# Altium PCB SCOPE_old.PcbDoc (part 3 of 4)
Units mil, origin at the board's own origin, x right, y up, seen from the top; angles counter-clockwise.
Board outline 7710 x 4000 mil, 2 copper layers (Top Layer, Bottom Layer); 218 components, 350 nets, 1635 pads, 357 vias.
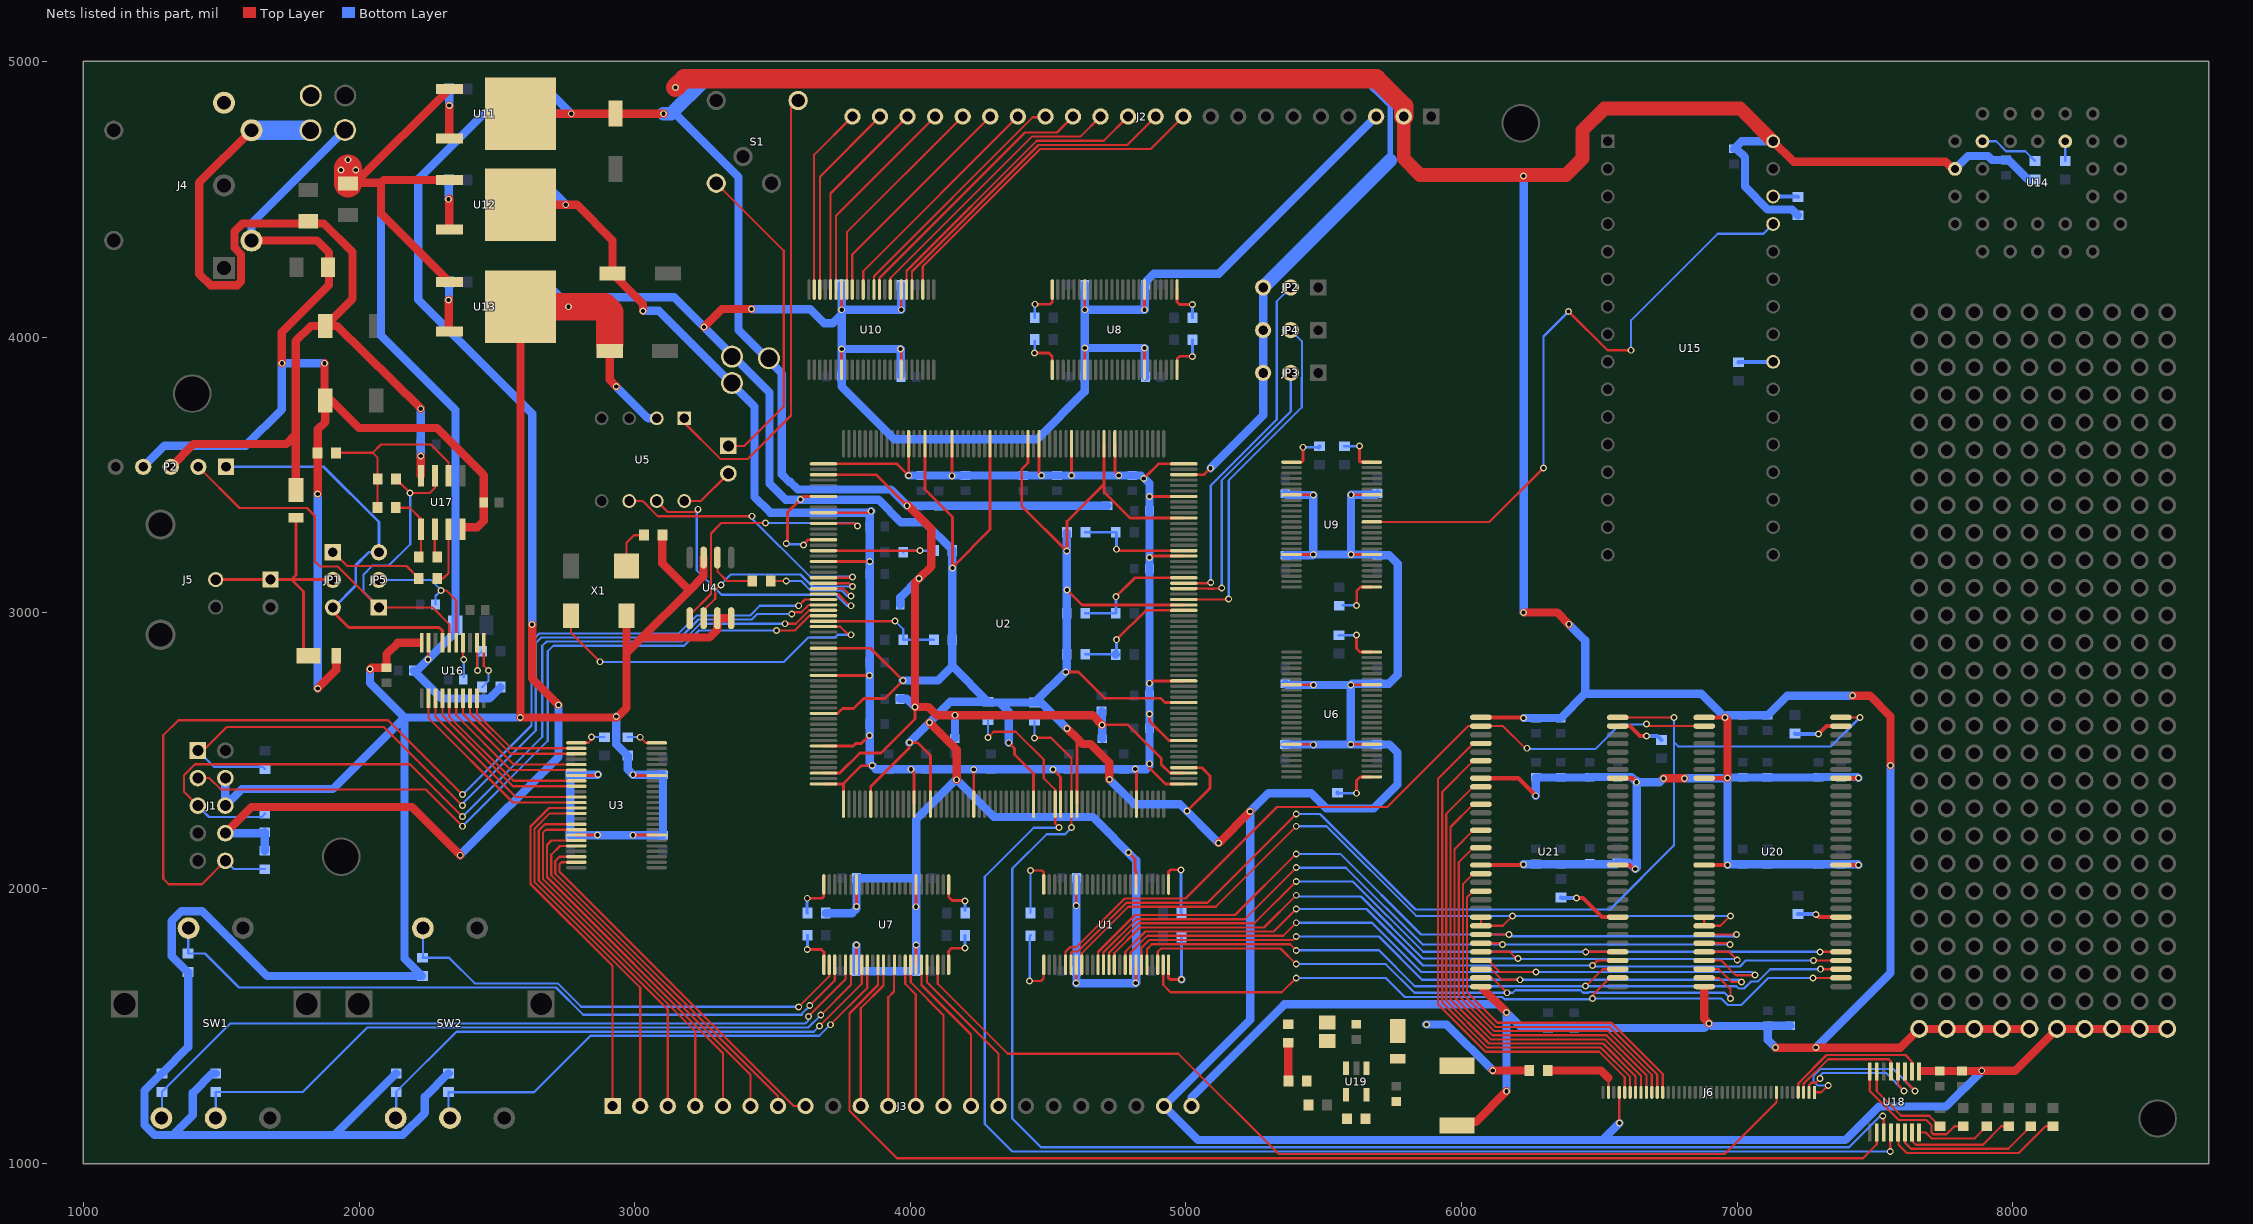
[diagram p3: the nets of this part, all layers, seen from the top]

## Via types
v1: diameter 25, hole 15, Top Layer to Bottom Layer, 357 vias

## Nets (pads, with @x,y where several pads share a name; then routed paths per layer and width w, separated by ;. In a path a pad name is that pad's centre, name@x,y a point inside that pad or via, vN(x,y) a via of type N, cw(c..) or ccw(c..) an arc to the next point about the centre after c; other vN are vias at no path point) (continued)
NetC60_1: C60.1 U16.14 | length 124
  Top Layer w8: U16.14@2377.5,2890.5 2377.5,2832.5 v1(2380,2830)
  Bottom Layer w8: C60.1@2380,2767.56 v1(2380,2830)
NetC61_1: C61.1 JP5.2 U16.15 | length 524.8
  Top Layer w8: v1(2298,3081) 2316,3081 2352.5,3044.5 U16.15@2352.5,2890.5
  Bottom Layer w8: JP5.2@2072,3119 2260,3119 v1(2298,3081) 2277.56,3060.56 C61.1@2277.56,3030
NetC69_1: C69.1 R59.1 R60.2 U19.3
NetC69_2: C69.2 C70.1 D3.K R35.2 R76.2 | length 442.7
  Top Layer w30: v1(6113,1339) R35.2@6245.54,1339
  Bottom Layer w30: v1(5872,1506) 5946,1506 v1(6113,1339)
NetD1_A: D1.A D2.K J5.1 JP1.2 P1.1 | length 952
  Top Layer w8: D2.K@1798.07,2862.73 D2.K@1816.8,2844
  Top Layer w10: J5.1@1480,3120 P1.1@1679,3120 1755,3120 ; D1.A@1771,3344.8 1771,3136 1755,3120 ; D2.K@1798.07,2862.73 1798.07,3076.93 1755,3120 ; JP1.2@1899,3120 1755,3120
NetD3_A: D3.A L1.2 U19.1
NetJ1_1: J1.1 R9.2 U2.27 | length 3186.5
  Top Layer w8: J1.1@1415,2500 1435,2500 1520,2585 2090,2585 v1(2375,2300) ; v1(3570,2995) 3576.5,3001.5 3604.73,3001.5 3631.42,3028.19 U2.27@3685,3028.19
  Bottom Layer w8: J1.1@1415,2500 1474,2441 1650.54,2441 R9.2@1659,2432.54 ; v1(2375,2300) 2375,2306.77 2641,2572.77 2641,2889.79 2661.21,2910 3166.21,2910 3231.21,2975 3425,2975 3445,2995 v1(3570,2995)
NetJ1_3: J1.3 U2.29 | length 2849.3
  Top Layer w8: J1.3@1415,2400 1457.02,2400 1498.02,2359 2241,2359 v1(2375,2225) ; v1(3515,2935) 3580.66,2935 3634.48,2988.82 U2.29@3685,2988.82
  Bottom Layer w8: v1(2375,2225) 2685,2535 2685,2860 2705,2880 3178.64,2880 3233.64,2935 v1(3515,2935)
NetJ1_5: J1.5 R8.2 U2.28 | length 3331.7
  Top Layer w8: J1.5@1415,2300 1365,2350 1365,2410 1405,2450 2185,2450 v1(2375,2260) ; v1(3545,2960) 3584.45,2960 3632.95,3008.5 U2.28@3685,3008.5
  Bottom Layer w8: J1.5@1415,2300 1456,2259 1646.54,2259 R8.2@1658,2270.46 R8.2@1645.54,2258 ; v1(2375,2260) 2665,2550 2665,2880 2680,2895 3172.43,2895 3237.43,2960 v1(3545,2960)
NetJ1_10: J1.10 R7.2 U2.26 | length 3945.2
  Top Layer w8: J1.10@1515,2100 1430,2015 1310,2015 1290,2035 1290,2555 1345,2610 2105,2610 v1(2375,2340) ; v1(3595,3025) 3617.87,3047.87 U2.26@3685,3047.87
  Bottom Layer w8: J1.10@1515,2100 1544.46,2070.54 R7.2@1658,2070.54 ; v1(2375,2340) 2626,2591 2626,2896 2655,2925 3160,2925 3225,2990 3418.79,2990 3453.79,3025 v1(3595,3025)
NetJ6_2: J6.2 R35.1 | length 283.6
  Top Layer w8: J6.2@6532.67,1260 6532.67,1312.33
  Top Layer w30: R35.1@6312.46,1339 6506,1339 6532.67,1312.33
NetJP1_1: JP1.1 R42.2 | length 350.1
  Top Layer w8: JP1.1@1906.54,3220 1957.54,3169 2172.54,3169 R42.2@2217.04,3124.5
NetJP1_3: JP1.3 JP5.3 P2.1 U16.17 | length 1526.3
  Top Layer w8: JP1.3@1894.34,3014.34 JP1.3@1897.34,3011.34
  Top Layer w10: JP1.3@1897.34,3011.34 1962.67,2946 2291,2946 2302.5,2934.5 U16.17@2302.5,2890.5
  Bottom Layer w10: P2.1@1517,3529 1872,3529 2072,3329 JP5.3@2072,3219 2035,3219 1988,3172 1988,3098 JP1.3@1909,3019
  Bottom Layer w30: JP1.3@1905,3019 JP1.3@1909,3019
NetJP2_2: JP2.2 U2.158 | length 1289.3
  Top Layer w8: U2.158@4992.09,3106.93 5076.93,3106.93 5080,3110 v1(5090,3110)
  Bottom Layer w8: v1(5090,3110) 5090,3461.21 5329.39,3700.61 5329.39,4129.39 JP2.2@5380,4180
NetJP3_2: JP3.2 U2.157 | length 1023.2
  Top Layer w8: U2.157@4992.09,3087.24 5079.52,3087.24 5080.27,3086.5 5099.73,3086.5 5100.48,3087.24 5122.24,3087.24 5125,3090 v1(5130,3090)
  Bottom Layer w8: v1(5130,3090) 5130,3480 5380,3730 JP3.2@5380,3870
NetJP4_2: JP4.2 U2.155 | length 1265.6
  Top Layer w8: U2.155@4992.09,3047.87 5152.87,3047.87 v1(5155,3050)
  Bottom Layer w8: v1(5155,3050) 5155,3480 5420,3745 5420,3852.16 5420.53,3852.69 5420.53,3984.47 JP4.2@5380,4025
NetJP5_1: JP5.1 P2.2 R39.2 U16.16 U17.7 | length 2068.5
  Top Layer w8: P2.2@1417,3529 1566,3380 1811,3380 1840,3351 1840,3186 1859,3167 1924,3167 JP5.1@2072,3019 2267,3019 2327.5,2958.5 U16.16@2327.5,2890.5 ; R39.2@2134.46,3485 v1(2185.46,3434) 2257,3434 2275,3452 U17.7@2275,3497
  Bottom Layer w8: JP5.1@2072,3019 2016,3075 2016,3138 2048,3170 2107,3170 2185.46,3248.46 v1(2185.46,3434)
NetR3_1: R3.1 U1.1 | length 250.5
  Top Layer w10: U1.1@4937,2014 4937,2060 4944,2067 v1(4982,2067)
  Bottom Layer w10: v1(4982,2067) 4982,1912.46 R3.1@4983.46,1911
NetR4_1: R4.1 U1.48 | length 252
  Top Layer w10: U1.48@4937,1722.66 4937,1674 4942,1669 v1(4984,1669)
  Bottom Layer w10: v1@4983.46,1669.54 R4.1@4983.46,1823
  Bottom Layer w30: v1@4983.46,1669.54 v1(4984,1669)
NetR5_1: R5.1 U1.24 | length 249.8
  Top Layer w8: v1(4436,2065) 4478,2065 4484.24,2058.76 U1.24@4484.24,2014
  Bottom Layer w8: R5.1@4435.54,1911 4435.54,2064.54 v1(4436,2065)
NetR6_1: R6.1 U1.25 | length 271.4
  Top Layer w8: v1(4433,1664) 4474,1664 4483,1673 4483,1721.42 U1.25@4484.24,1722.66
  Bottom Layer w8: v1(4433,1664) 4433,1826.46 R6.1@4436.54,1830
NetR10_1: R10.1 U4.2 | length 191
  Top Layer w8: U4.2@3300,3200 3300,3150 3335,3115 R10.1@3426.54,3115
NetR10_2: R10.2 U2.24 | length 425.6
  Top Layer w8: R10.2@3493.46,3115 v1(3550,3115) ; U2.24@3685,3087.24 3757.76,3087.24 v1(3785,3060)
  Bottom Layer w8: v1(3550,3115) 3603.79,3115 3638.79,3080 3751.77,3080 3770.27,3061.5 3783.5,3061.5 v1(3785,3060)
NetR11_1: R11.1 U3.24 | length 113.6
  Top Layer w8: v1(3020,2548) 3040.24,2527.76 U3.24@3080,2527.76
  Bottom Layer w8: R11.1@2975,2548.46 3019.54,2548.46 v1(3020,2548)
NetR12_1: R12.1 U3.25 | length 117.8
  Top Layer w8: U3.25@2788.66,2527.76 2831.76,2527.76 2844,2540 v1(2844,2549)
  Bottom Layer w8: v1(2844,2549) 2844.54,2548.46 R12.1@2890,2548.46 R12.1@2888.46,2550
NetR13_2: R13.2 R63.2 U2.159 | length 445.8
  Top Layer w10: v1(4746,3058) 4814.61,3126.61 U2.159@4992.09,3126.61
  Bottom Layer w10: R13.2@4634.46,2998 R63.2@4745.54,2998 4746,2998.46 v1(4746,3058)
NetR14_2: R14.2 R64.2 U2.153 | length 454.7
  Top Layer w10: v1(4748,2902) 4854.5,3008.5 U2.153@4992.09,3008.5
  Bottom Layer w10: R14.2@4634.46,2849 R64.2@4744.54,2849 ; R64.2@4745.54,2848 4748,2850.46 v1(4748,2902)
  Bottom Layer w30: R64.2@4744.54,2849 R64.2@4745.54,2848
NetR15_2: R15.2 R65.2 U2.17 | length 463.6
  Top Layer w8: U2.17@3685,3225.04 v1(4035.04,3225.04)
  Bottom Layer w8: R65.2@3974.46,3219 3980.5,3225.04 v1(4035.04,3225.04) R15.2@4085.54,3225 R15.2@4085.54,3225
NetR16_2: R16.2 U6.48 | length 172.9
  Top Layer w10: v1(5618.46,2918.46) 5618.46,2870.54 5632,2857 U6.48@5674.34,2857
  Bottom Layer w10: R16.2@5555,2918.46 v1(5618.46,2918.46)
NetR17_1: R17.1 X1.1 | length 156.9
  Top Layer w8: X1.1@2970,3170 2970,3253.46 2997.54,3281 R17.1@3032,3281
NetR18_2: R18.2 U6.25 | length 176.5
  Top Layer w10: v1(5619,2345) 5619,2391 5632.24,2404.24 U6.25@5674.34,2404.24
  Bottom Layer w10: R18.2@5551.54,2345 v1(5619,2345)
  Bottom Layer w15: R18.2@5550,2346.54 R18.2@5551.54,2345
NetR19_1: R19.1 U7.1 | length 130.4
  Top Layer w10: U7.1@4139,2014 4139,1969 4152,1956 4185,1956
  Bottom Layer w10: R19.1@4198.46,1920 v1(4198.46,1954)
NetR20_1: R20.1 U7.48 | length 159.9
  Top Layer w10: U7.48@4139,1722.66 4139,1770 4138,1771 4150,1783 v1(4198,1783)
  Bottom Layer w10: v1(4198,1783) 4198.46,1783.46 R20.1@4198.46,1829
NetR21_1: R21.1 U7.24 | length 160.6
  Top Layer w10: v1(3626,1964) 3679,1964 3686,1971 3686,2013.76 U7.24@3686.24,2014
  Bottom Layer w10: v1@3625,1964 3625,1911.54 R21.1@3626.54,1910
NetR22_1: R22.1 U7.25 | length 162.8
  Top Layer w10: v1(3626,1778) 3677,1778 3687,1768 3687,1723.42 U7.25@3686.24,1722.66
  Bottom Layer w10: v1@3626.54,1778 R22.1@3626.54,1830
NetR23_1: R23.1 U8.48 | length 161.7
  Top Layer w10: v1(4452,4119) 4507,4119 4515,4127 U8.48@4515,4172.34
  Bottom Layer w10: R23.1@4451.54,4070 v1@4451.54,4120
NetR24_1: R24.1 U8.24 | length 158.5
  Top Layer w10: U8.24@4968.48,3881 4968.48,3921.48 4977,3930 v1(5023,3930)
  Bottom Layer w10: v1@5023.46,3930 R24.1@5023.46,3990
NetR25_1: R25.1 U8.25 | length 152.2
  Top Layer w10: U8.25@4967.76,4172.34 4967.76,4127.24 4977,4118 v1(5023,4118)
  Bottom Layer w10: R25.1@5023.46,4070 v1@5023.46,4118
NetR26_1: R26.1 U8.1 | length 161
  Top Layer w10: v1(4451,3942) 4503,3942 4515,3930 U8.1@4515,3881
  Bottom Layer w10: v1@4451.54,3942 R26.1@4451.54,3985
NetR27_1: R27.1 U9.48 | length 157.2
  Top Layer w10: v1(5630,3605) 5630,3549 5632,3547 5673.34,3547 U9.48@5674.34,3546
  Bottom Layer w10: R27.1@5575,3603.46 v1@5628.46,3603.46
  Bottom Layer w15: v1@5628.46,3603.46 v1(5630,3605)
NetR29_1: R29.1 U9.1 | length 154.5
  Top Layer w10: U9.1@5383,3546 5420,3546 5425,3551 v1(5425,3600)
  Bottom Layer w10: v1(5425,3600) R29.1@5481.54,3600
  Bottom Layer w15: R29.1@5481.54,3600 R29.1@5485,3603.46
NetR30_1: R30.1 U9.25 | length 163.5
  Top Layer w10: v1@5620,3026 5620,3080 5633.24,3093.24 U9.25@5674.34,3093.24
  Bottom Layer w10: R30.1@5570,3026.54 5617.46,3026.54 v1@5619,3025
  other v1: 5619,3026
NetR31_2: R31.2 U11.3 | length 180.4
  Top Layer w30: U11.3@2327.5,4720 v1(2327.5,4840)
  Bottom Layer w30: R31.2@2326.54,4900 2327.5,4899.04 v1(2327.5,4840)
NetR32_2: R32.2 U14.31 | length 219.6
  Bottom Layer w8: U14.31@7890,4710 7939.09,4710 7975.09,4674 8044.46,4674 R32.2@8080,4638.46
NetR33_2: R33.2 U14.24 | length 71.5
  Bottom Layer w8: R33.2@8190,4638.46 U14.24@8190,4710
NetR34_2: R34.2 U15.24 | length 125.6
  Bottom Layer w15: R34.2@7005,3908.46 7006.54,3910 U15.24@7130,3910
NetR36_2: R36.2 U15.30 | length 90.6
  Bottom Layer w15: U15.30@7130,4510 7218.46,4510 R36.2@7220,4508.46
NetR37_2: R37.2 U16.12 | length 178.4
  Top Layer w8: U16.12@2427.5,2890.5 2427.5,2792.5 v1(2430,2790)
  Bottom Layer w8: v1(2430,2790) 2430,2843.46 R37.2@2446.54,2860
NetR38_2: R38.2 U16.11 | length 177.5
  Top Layer w8: U16.11@2452.5,2890.5 2452.5,2807.5 v1(2470,2790)
  Bottom Layer w8: R38.2@2446.54,2730 2470,2753.46 v1(2470,2790)
NetR39_1: R39.1 R40.1 R43.2 U17.6 | length 701.7
  Top Layer w8: R43.2@1916.46,3580 2050,3580 ; R40.1@2066.54,3381 2066.54,3563.46 2050,3580 ; U17.6@2325,3497 2325,3545 2260,3610 2080,3610 2050,3580
NetR40_2: R40.2 R41.1 U17.1 | length 249.5
  Top Layer w8: R40.2@2133.46,3381 2184,3381 2225,3340 U17.1@2225,3303 R41.1@2225,3199
NetR41_2: R41.2 U17.2 | length 104
  Top Layer w8: R41.2@2275,3199 U17.2@2275,3303
NetR42_1: R42.1 U17.3 | length 208.6
  Top Layer w8: R42.1@2283.46,3124 2304.68,3124 2325,3144.32 U17.3@2325,3303
NetR46_2: R46.2 U18.16 | length 272.3
  Top Layer w8: U18.16@7659.57,1114 7683.36,1114 7704.55,1092.82 7861.28,1092.82 R46.2@7905,1136.54
NetR47_2: R47.2 U18.15 | length 414.4
  Top Layer w8: U18.15@7633.98,1114 7633.98,1084.03 7648.01,1070 7891.42,1070 7957.96,1136.54 R47.2@7985,1136.54
NetR48_2: R48.2 U18.14 | length 536.7
  Top Layer w8: U18.14@7608.39,1114 7608.39,1076.61 7630,1055 7983.46,1055 R48.2@8065,1136.54
NetR49_2: R49.2 U18.13 | length 657.3
  Top Layer w8: U18.13@7582.8,1114 7585,1111.8 7585,1070 7615,1040 8021.42,1040 8117.96,1136.54 R49.2@8145,1136.54
NetR50_1: R50.1 U18.7 | length 353.8
  Top Layer w8: U18.7@7506.02,1336 7506.02,1263.98 7595,1175 7696.54,1175 R50.1@7735,1136.54
NetR51_1: R51.1 U18.8 | length 503.3
  Top Layer w8: U18.8@7480.43,1336 7480.43,1264.57 7585,1160 7685,1160 7704.31,1140.69 7704.31,1114.26 7710.76,1107.82 7759.24,1107.82 7787.96,1136.54 R51.1@7820,1136.54
NetR58_2: R58.2 U19.4
NetR59_2: R59.2 R76.1 | length 138.7
  Top Layer w30: R59.2@5370.54,1301 5371,1301.46 R76.1@5371,1439.54
NetR61_2: R61.2 R62.2 U2.30 | length 450.4
  Top Layer w8: U2.30@3685,2969.13 v1@3945,2969.13
  Bottom Layer w8: v1@3945,2969.13 3974.13,2940 3974.13,2902.33 R62.2@3974.46,2902 R61.2@4085.54,2902
  other v1: 3945,2970
NetR66_2: R66.2 R67.2 U2.164 | length 415.7
  Top Layer w10: v1(4748,3230) 4752.96,3225.04 U2.164@4992.09,3225.04
  Bottom Layer w10: R66.2@4635.46,3292 R67.2@4745.54,3292 ; v1(4748,3230) R67.2@4748,3289.54
NetR68_2: R68.2 U20.63 | length 178.5
  Top Layer w15: v1(7295,2560) 7323.5,2588.5 U20.63@7376.06,2588.5
  Bottom Layer w15: R68.2@7210,2561.54 7211.54,2560 v1(7295,2560)
NetR69_2: R69.2 U21.63 | length 179.7
  Top Layer w15: U21.63@6566.06,2588.5 6611.5,2588.5 6647,2553 v1(6671,2553)
  Bottom Layer w15: v1(6671,2553) 6710.46,2553 R69.2@6725,2538.46
NetR70_1: R70.1 U20.41 | length 160.6
  Top Layer w15: v1(7285,1905) 7294.41,1895.59 U20.41@7376.06,1895.59
  Bottom Layer w15: R70.1@7220,1906.54 7283.46,1906.54 v1(7285,1905)
NetR71_1: R71.1 U21.41 | length 235.5
  Top Layer w15: v1(6417,1965) 6440,1965 6509.41,1895.59 U21.41@6566.06,1895.59
  Bottom Layer w15: R71.1@6360,1966.54 6361.54,1965 v1(6417,1965)
NetR73_2: R73.2 U12.3 | length 186.7
  Top Layer w30: v1(2325,4500) 2327.5,4502.5 U12.3@2327.5,4390
  Bottom Layer w30: v1(2325,4500) 2325,4568.46 R73.2@2326.54,4570
NetR75_2: R75.2 U13.3 | length 181.7
  Top Layer w30: v1(2325,4135) 2325,4022.5 U13.3@2327.5,4020
  Bottom Layer w30: v1(2325,4135) 2326.54,4136.54 R75.2@2326.54,4200
NetS1_1: S1.1 U5.1 | length 1672.2
  Top Layer w8: U5.1@3172,3697 3312,3557 3409,3557 3567,3715 3567,4832 S1.1@3593,4858
NetS1_4: S1.4 W1.1 | length 1171.7
  Top Layer w8: S1.4@3296,4558 3541,4313 3541,3748 3398,3605 W1.1@3340,3605
NetU2_12: U2.12 U4.5 | length 1017.4
  Top Layer w8: U4.5@3200,2980 3200,2990.53 3277,3067.53 3277,3287.53 3314.47,3325 v1(3475,3325) ; U2.12@3685,3323.46 3798.54,3323.46 v1(3808,3314)
  Bottom Layer w8: v1(3475,3325) 3797,3325 v1(3808,3314)
NetU2_23: U2.23 U4.6 | length 771.3
  Top Layer w8: U4.6@3250,2980 3250,3008.79 3292,3050.79 3292,3082 3310,3100 v1(3312.5,3100) ; U2.23@3685,3106.93 3777.48,3106.93 3789.41,3095 v1(3790,3095)
  Bottom Layer w8: v1@3310,3100 3348.5,3138.5 3601.5,3138.5 3645,3095 v1(3790,3095)
NetU2_25: U2.25 U5.7 | length 1124.7
  Top Layer w8: U5.7@3080,3405 3120,3365 3220,3365 v1(3230,3375) ; U2.25@3685,3067.56 3737.44,3067.56 3780,3025 v1(3785,3025)
  Bottom Layer w8: v1(3230,3375) 3225,3370 3225,3154.27 3302.77,3076.5 3303.5,3076.5 3315,3065 3730,3065 3770,3025 v1(3785,3025)
NetU2_31: U2.31 X1.3 | length 1274.5
  Top Layer w8: X1.3@2769.21,2988.9 2769.21,2926.79 v1(2874,2822) ; U2.31@3685,2949.45 3745.55,2949.45 3774.45,2920.55 3784.45,2920.55 v1(3785,2920)
  Bottom Layer w8: v1@2874,2821 3541,2821 3630,2910 3726.21,2910 3736.21,2920 v1(3785,2920)
NetU5_8: U5.8 W1.2 | length 201.4
  Top Layer w8: U5.8@3180,3405 3240,3405 W1.2@3340,3505
PENIRQ: U7.35 U18.10 | length 4434
  Top Layer w8: U7.35@3883.09,1722.66 3883.09,1649.31 3779.47,1545.69 3779.47,1193.21 3951.69,1021 7456,1021 7506.02,1071.02 U18.10@7506.02,1114
PIN9: J2.10 U10.27 | length 1253.6
  Top Layer w8: U10.27@4045.39,4172.34 4045.39,4255.96 4471.43,4682 4872,4682 J2.10@4990,4800
PIN10: J2.11 U10.29 | length 1182.3
  Top Layer w8: U10.29@4006.01,4172.34 4006.01,4237.8 4465.21,4697 4787,4697 J2.11@4890,4800
PIN11: J2.12 U10.30 | length 1102.9
  Top Layer w8: U10.30@3986.33,4172.34 3986.33,4239.33 4459,4712 4702,4712 J2.12@4790,4800
PIN12: J2.13 U10.33 | length 1046.7
  Top Layer w8: U10.33@3927.28,4172.34 3927.28,4213.27 4441,4727 4617,4727 J2.13@4690,4800
PIN13: J2.14 U10.35 | length 986.4
  Top Layer w8: U10.35@3887.91,4172.34 3887.91,4213.9 4416,4742 4532,4742 J2.14@4590,4800
PIN14: J2.15 U10.36 | length 902
  Top Layer w8: U10.36@3868.22,4172.34 3868.22,4220.91 4444.31,4797 J2.15@4483,4797
PIN15: J2.16 U10.38 | length 860.1
  Top Layer w8: U10.38@3828.85,4172.34 3828.85,4238.85 J2.16@4390,4800
PIN16: J2.17 U10.40 | length 835
  Top Layer w8: U10.40@3789.48,4172.34 3789.48,4299.48 J2.17@4290,4800
PIN17: J2.18 U10.41 | length 801.7
  Top Layer w8: U10.41@3769.8,4172.34 3769.8,4379.8 J2.18@4190,4800
PIN18: J2.19 U10.43 | length 776.6
  Top Layer w8: U10.43@3730.43,4172.34 3730.43,4440.43 J2.19@4090,4800
PIN19: J2.20 U10.44 | length 743.3
  Top Layer w8: U10.44@3710.74,4172.34 3710.74,4520.74 J2.20@3990,4800
PIN20: J2.21 U10.46 | length 718
  Top Layer w8: U10.46@3672,4172.34 3672,4582 J2.21@3890,4800
PIN21: J2.22 U10.47 | length 685.2
  Top Layer w8: U10.47@3651,4172.34 3651,4661 J2.22@3790,4800
PIN22: J3.1 U3.37 | length 1332.1
  Top Layer w8: U3.37@2788.66,2291.53 2689.53,2291.53 2622,2224 2622,2016 2920,1718 J3.1@2920,1210
PIN23: J3.2 U3.38 | length 1340
  Top Layer w8: U3.38@2788.66,2271.85 2691.85,2271.85 2637,2217 2637,2022.21 3020,1639.21 J3.2@3020,1210
PIN24: J3.3 U3.40 | length 1339.8
  Top Layer w8: U3.40@2788.66,2232.48 2674.48,2232.48 2652,2210 2652,2028.43 3120,1560.43 J3.3@3120,1210
PIN25: J3.4 U3.41 | length 1347.2
  Top Layer w8: U3.41@2788.66,2212.8 2677.8,2212.8 2667,2202 2667,2034.64 3220,1481.64 J3.4@3220,1210
PIN26: J3.5 U3.43 | length 1324.7
  Top Layer w8: U3.43@2788.66,2173.43 2698.43,2173.43 2682,2157 2682,2040.85 3320,1402.85 J3.5@3320,1210
PIN27: J3.6 U3.44 | length 1316.3
  Top Layer w8: U3.44@2788.66,2153.74 2728.74,2153.74 2697,2122 2697,2047.07 3420,1324.07 J3.6@3420,1210
PIN28: J3.7 U3.46 | length 1306.7
  Top Layer w8: U3.46@2788.66,2114.37 2727.37,2114.37 2712,2099 2712,2053.28 3520,1245.28 J3.7@3520,1210
PIN29: J3.8 U3.47 | length 1336.7
  Top Layer w8: U3.47@2788.66,2094.68 2734.68,2094.68 2727,2087 2727,2060.31 3577.31,1210 J3.8@3620,1210
PIN31: J3.10 U7.36 | length 547
  Top Layer w8: J3.10@3820,1210 3820,1565 3902.78,1647.78 U7.36@3902.78,1722.66
PIN32: J3.11 U7.38 | length 521.4
  Top Layer w8: J3.11@3920,1210 3920,1605 3941,1626 U7.38@3941,1722.66
PIN33: J3.12 U7.40 | length 528.6
  Top Layer w8: U7.40@3981.52,1722.66 3981.52,1653.48 4020,1615 J3.12@4020,1210
PIN34: J3.13 U7.41 | length 561.9
  Top Layer w8: U7.41@4001.2,1722.66 4001.2,1658.8 4120,1540 J3.13@4120,1210
PIN35: J3.14 U7.43 | length 587
  Top Layer w8: U7.43@4040.57,1722.66 4040.57,1649.42 4220,1470 J3.14@4220,1210
PIN36: J3.15 U7.44 | length 620.2
  Top Layer w8: U7.44@4060.26,1722.66 4060.26,1659.74 4320,1400 J3.15@4320,1210
R0: J6.5 U21.4 | length 1868.3
  Top Layer w8: U21.4@6070,2525.51 6042.49,2525.51 5914.63,2397.65 5914.63,1579.29 6086.92,1407 6499.79,1407 6591.73,1315.06 J6.5@6591.73,1260
R1: J6.6 U21.6 | length 1801
  Top Layer w8: U21.6@6070,2462.52 6042.49,2462.52 5929.63,2349.66 5929.63,1585.5 6093.13,1422 6506,1422 6611.41,1316.59 J6.6@6611.41,1260
R2: J6.7 U21.9 | length 1702.6
  Top Layer w8: U21.9@6070,2368.03 6042.49,2368.03 5944.63,2270.17 5944.63,1591.71 6099.34,1437 6512.79,1437 6631.1,1318.69 J6.7@6631.1,1260
R3: J6.8 U21.11 | length 1635.3
  Top Layer w8: U21.11@6070,2305.04 6042.49,2305.04 5959.63,2222.18 5959.63,1597.93 6105.56,1452 6519,1452 6650.78,1320.22 J6.8@6650.78,1260
R4: J6.9 U21.14 | length 1536.7
  Top Layer w8: U21.14@6070,2210.55 6042.49,2210.55 5974.63,2142.69 5974.63,1604.14 6111.77,1467 6525.36,1467 6670.47,1321.89 J6.9@6670.47,1260
R5: J6.10 U21.16 | length 1469.4
  Top Layer w8: U21.16@6070,2147.56 6042.49,2147.56 5989.63,2094.7 5989.63,1610.35 6117.98,1482 6531.57,1482 6690.15,1323.42 J6.10@6690.15,1260
R6: J6.11 U21.19 | length 1370.6
  Top Layer w8: U21.19@6070,2053.07 6042.49,2053.07 6004.63,2015.21 6004.63,1616.57 6124.2,1497 6537.79,1497 6709.84,1324.95 J6.11@6709.84,1260
R7: J6.12 U21.21 | length 1303.4
  Top Layer w8: U21.21@6070,1990.08 6042.49,1990.08 6019.63,1967.22 6019.63,1622.78 6130.41,1512 6544,1512 6729.52,1326.48 J6.12@6729.52,1260
RAS: U1.35 U20.26 U21.26 | length 2852.6
  Top Layer w8: U1.35@4681.1,1726.66 4681.1,1769.24 4814.85,1903 5178,1903 v1(5400,2125) ; U21.26@6070,1832.6 v1(6172.4,1832.6) ; U20.26@6880,1832.6 v1(6997.6,1832.6)
  Bottom Layer w8: v1(5400,2125) 5560,2125 5852.4,1832.6 v1(6172.4,1832.6) 6178.5,1826.5 6991.5,1826.5 v1(6997.6,1832.6)
ROT0A: R55.2 SW1.1 U7.29 | length 2806.3
  Top Layer w8: v1(3630,1535) 3764.99,1669.98 U7.29@3764.99,1722.66
  Bottom Layer w8: SW1.1@1283.15,1166.61 1285,1168.46 R55.2@1285,1261.54 1533.46,1510 3620,1510 3630,1520 v1(3630,1535)
ROT0B: R56.2 SW1.3 U7.30 | length 2633.4
  Top Layer w8: v1(3675,1540) 3784.67,1649.67 U7.30@3784.67,1722.66
  Bottom Layer w8: SW1.3@1480,1166.61 R56.2@1480,1261.54 1796.54,1261.54 2030,1495 3630,1495 v1(3675,1540)
ROT1A: R52.2 SW2.1 U7.32 | length 2015.9
  Top Layer w8: v1(3670,1500) 3824.04,1654.04 U7.32@3824.04,1722.66
  Bottom Layer w8: SW2.1@2133.15,1166.61 2135,1168.46 R52.2@2135,1261.54 2353.46,1480 3650,1480 v1(3670,1500)
ROT1B: R53.2 SW2.3 U7.33 | length 1857.2
  Top Layer w8: v1(3710,1505) 3843.72,1638.72 U7.33@3843.72,1722.66
  Bottom Layer w8: SW2.3@2330,1166.61 2325,1171.61 R53.2@2325,1261.54 2326.54,1260 2635,1260 2840,1465 3670,1465 v1(3710,1505)
SCL: R1.2 U2.100 U18.12 | length 5222.3
  Top Layer w8: v1(4282,2547) 4303,2568 4383,2568 4484,2467 4484,2399 4525.55,2357.45 U2.100@4525.55,2305.75 4525.55,2234.45 v1(4540,2220) ; v1(7555,1045) 7555,1111.8 U18.12@7557.2,1114
  Bottom Layer w8: v1(4282,2547) R1.2@4282,2609.54 ; v1(4540,2220) 4448,2220 4270,2042 4270,1145 4370,1045 v1(7555,1045)
SCLK: U1.30 U20.64 U21.64 | length 4226.6
  Top Layer w8: U1.30@4582.67,1726.66 4582.67,1765.67 4588.06,1771.06 4607.64,1771.06 4784.57,1948 5078,1948 v1(5400,2270) ; U21.64@6566.06,2620 v1(6770,2620) ; U20.64@7376.06,2620 v1(7445,2620)
  Bottom Layer w8: v1(5400,2270) 5486.21,2270 5832.71,1923.5 6538.5,1923.5 6770,2155 v1(6770,2620) 6770,2531 6786,2515 7340,2515 v1(7445,2620)
SDA: R2.2 U2.103 U18.11 | length 4979.2
  Top Layer w8: v1(4451,2546) 4510,2546 4584.61,2471.39 U2.103@4584.61,2305.75 4584.61,2220.39 v1(4585,2220) ; v1@7528,1182 v1(7528,1174) 7531.61,1170.39 U18.11@7531.61,1114 U18.11@7532,1113.61
  Bottom Layer w8: v1(4451,2546) R2.2@4451,2607.54 ; v1(4585,2220) 4561.5,2196.5 4494.5,2196.5 4370,2072 4370,1165 4474.39,1060.61 7405.61,1060.61 7519,1174 v1(7528,1174)
SIG0: U3.36 U16.2 | length 735
  Top Layer w8: U16.2@2252.5,2689.5 2252.5,2617.5 2558.78,2311.22 U3.36@2788.66,2311.22
SIG1: U3.35 U16.3 | length 698.9
  Top Layer w8: U16.3@2277.5,2689.5 2277.5,2622.5 2569.09,2330.91 U3.35@2788.66,2330.91
SIG2: U3.33 U16.4 | length 655.4
  Top Layer w8: U16.4@2302.5,2689.5 2302.5,2627.5 2312.5,2617.5 2312.5,2616.29 2558.51,2370.28 U3.33@2788.66,2370.28
SIG3: U3.32 U16.5 | length 624.5
  Top Layer w8: U16.5@2327.5,2689.5 2327.5,2622.5 2560.04,2389.96 U3.32@2788.66,2389.96
SIG4: U3.30 U16.6 | length 580.2
  Top Layer w8: U16.6@2352.5,2689.5 2352.5,2627.5 2550.67,2429.33 U3.30@2788.66,2429.33
SIG5: U3.29 U16.7 | length 544.2
  Top Layer w8: U16.7@2377.5,2689.5 2377.5,2632.5 2560.99,2449.01 U3.29@2788.66,2449.01
SIG6: U3.27 U16.8 | length 500.6
  Top Layer w8: U16.8@2402.5,2689.5 2402.5,2636.29 2550.4,2488.39 U3.27@2788.66,2488.39
SIG7: U3.26 U16.9 | length 469.7
  Top Layer w8: U16.9@2427.5,2689.5 2427.5,2632.5 2551.93,2508.07 U3.26@2788.66,2508.07
SW0: R57.2 SW1.4 U7.27 | length 2734.5
  Top Layer w8: v1(3635,1575) 3725.61,1665.62 U7.27@3725.61,1722.66
  Bottom Layer w8: v1(3635,1575) 3635,1573.23 3606.5,1544.73 3606.5,1541.5 2813.19,1541.5 2714.48,1640.21 2606.94,1640.21 1564.79,1640.21 1441.54,1763.46 R57.2@1380,1763.46 ; R57.2@1380,1763.46 1380,1854.02 SW1.4@1381.57,1855.59 1381.57,1765.04 R57.2@1380,1763.46
SW1: R54.2 SW2.4 U7.26 | length 1745.3
  Top Layer w8: v1(3595,1570) 3705.93,1680.93 U7.26@3705.93,1722.66
  Bottom Layer w8: SW2.4@2231.57,1855.59 2231.57,1750.04 R54.2@2230,1748.46 2326.54,1748.46 2419.79,1655.21 2720.69,1655.21 2805.9,1570 v1(3595,1570)
TRG: U1.29 U20.2 U21.2 | length 2786.4
  Top Layer w8: U1.29@4562.98,1726.66 4562.98,1769.98 4579.06,1786.06 4601.42,1786.06 4778.36,1963 4998,1963 5330,2295 5730,2295 6023.5,2588.5 U21.2@6070,2588.5 6150,2588.5 6230.5,2508 v1(6236.75,2508) ; v1(6671,2596) 6678.5,2588.5 U20.2@6880,2588.5
  Bottom Layer w8: v1(6236.75,2508) 6230.5,2508 6233.5,2505 6485,2505 6574,2594 v1@6671,2594
VA0: U1.37 U20.37 U21.37 | length 3023.8
  Top Layer w8: U1.37@4720.47,1726.66 4720.47,1766.19 4827.28,1873 5248,1873 v1(5400,2025) ; v1(6450.39,1769.61) U21.37@6566.06,1769.61 ; v1(7300.39,1769.61) U20.37@7376.06,1769.61
  Bottom Layer w8: v1(5400,2025) 5605,2025 5860.39,1769.61 v1(6450.39,1769.61) v1(7300.39,1769.61)
VA1: U1.40 U20.36 U21.36 | length 2897.7
  Top Layer w8: U1.40@4779.52,1726.66 4779.52,1769.52 4853,1843 5318,1843 v1(5400,1925) ; v1(6475,1720) 6493.11,1738.11 U21.36@6566.06,1738.11 ; v1(7276.89,1738.11) U20.36@7376.06,1738.11
  Bottom Layer w8: v1(5400,1925) 5655,1925 5860,1720 v1(6475,1720) 6478.5,1716.5 7009.73,1716.5 7031.34,1738.11 v1(7276.89,1738.11)
VA2: U1.44 U20.35 U21.35 | length 2814.9
  Top Layer w8: U1.44@4858.26,1726.66 4858.26,1779.26 4876,1797 5378,1797 v1(5400,1775) ; v1(6450,1645) 6511.61,1706.61 U21.35@6566.06,1706.61 ; v1(7301.61,1706.61) U20.35@7376.06,1706.61
  Bottom Layer w8: v1(5400,1775) 5700,1775 5830,1645 v1(6450,1645) 6996.77,1645 7005.27,1636.5 7024.73,1636.5 7049.73,1661.5 7074.73,1661.5 7119.85,1706.61 v1(7301.61,1706.61)
VA3: U1.47 U20.34 U21.34 | length 2781
  Top Layer w8: U1.47@4917.31,1726.66 4917.31,1649.68 4944,1623 5348,1623 v1(5400,1675) ; v1(6475,1600) 6475,1611.56 6538.56,1675.12 U21.34@6566.06,1675.12 ; v1(7275.12,1675.12) U20.34@7376.06,1675.12
  Bottom Layer w8: v1(5400,1675) 5725,1675 5794,1606 6146.77,1606 6155.27,1597.5 6472.5,1597.5 v1(6475,1600) 6941.77,1600 6965.27,1576.5 7014.92,1576.5 7113.54,1675.12 v1(7275.12,1675.12)
VA4: U1.46 U20.31 U21.31 | length 2473.9
  Top Layer w8: U1.46@4897.63,1726.66 4897.63,1769.63 4910,1782 5343,1782 v1(5400,1725) ; U21.31@6070,1675.12 6110.88,1675.12 v1(6165,1621) ; U20.31@6880,1675.12 6935,1675 6975,1635 v1(6975,1600)
  Bottom Layer w8: v1(5400,1725) 5725,1725 5829,1621 v1(6165,1621) 6186,1621 6195,1630 6431.77,1630 6440.27,1621.5 6459.73,1621.5 6461.73,1623.5 6484.73,1623.5 6486.73,1621.5 6953.5,1621.5 v1(6975,1600)
VA5: U1.43 U20.30 U21.30 | length 2631
  Top Layer w8: U1.43@4838.57,1726.66 4838.57,1784.58 4866,1812 5387,1812 v1(5400,1825) ; U21.30@6070,1706.61 6107.17,1706.61 6145.29,1668.5 v1(6211.5,1668.5) ; U20.30@6880,1706.61 6933.39,1706.61 6980,1660 v1(7015,1660)
  Bottom Layer w8: v1(5400,1825) 5700,1825 5856.5,1668.5 v1(6211.5,1668.5) 7006.5,1668.5 v1(7015,1660)
VA6: U1.41 U20.29 U21.29 | length 2854.3
  Top Layer w8: U1.41@4799.2,1726.66 4799.2,1767.2 4860,1828 5353,1828 v1(5400,1875) ; U21.29@6070,1738.11 6097.51,1738.11 6120.37,1715.25 6120.37,1714.63 6138.5,1696.5 v1(6270,1696.5) ; U20.29@6880,1738.11 6941.89,1738.11 6995,1685 v1(7065,1685)
  Bottom Layer w8: v1(5400,1875) 5675,1875 5853.5,1696.5 v1(6270,1696.5) 7053.5,1696.5 v1(7065,1685)
VA7: U1.38 U20.28 U21.28 | length 2765.6
  Top Layer w8: U1.38@4740.15,1726.66 4740.15,1764.66 4833.49,1858 5283,1858 v1(5400,1975) ; U21.28@6070,1769.61 6174.61,1769.61 6199.21,1745 v1(6205,1745) ; U20.28@6880,1769.61 6970.39,1769.61 v1(7000,1740)
  Bottom Layer w8: v1(5400,1975) 5405,1970 5635,1970 5860,1745 v1@6202.21,1745 ; v1(6205,1745) v1@6202.21,1745 ; v1(7000,1740) 6996.5,1743.5 6200.71,1743.5 v1@6202.21,1745
VA8: U1.36 U20.27 U21.27 | length 2735.5
  Top Layer w8: U1.36@4700.78,1726.66 4700.78,1767.71 4821.07,1888 5213,1888 v1(5400,2075) ; U21.27@6070,1801.1 6143.9,1801.1 v1(6148.9,1796.1) ; U20.27@6880,1801.1 6968.9,1801.1 v1(6973.9,1796.1)
  Bottom Layer w8: v1(5400,2075) 5580,2075 5860,1795 5860,1796.1 v1(6148.9,1796.1) v1(6973.9,1796.1)
VCC5: C1.1 C55.1 C56.1 C58.1 C68.1 C71.1 C72.1 C73.1 C74.1 C75.1 C76.1 C77.1 C78.1 C79.1 C80.1 C81.1 C82.1 C83.1 C84.1 C85.1 C86.1 C87.1 C88.1 C89.1 C90.1 C91.1 C92.1 C93.1 C94.1 C100.1 J2.2 J3.22 J4.5 L1.1 pad.0@7660,1490 pad.0@7760,1490 pad.0@7860,1490 pad.0@7960,1490 pad.0@8060,1490 pad.2@1825,4876 R32.1 R36.1 R38.1 R58.1 U11.1 U12.1 U13.1 U14.32 U15.32 U16.19 U19.5 U20.1 U20.8 U20.18 U20.32 U20.47 U20.57 U21.1 U21.8 U21.18 U21.32 U21.47 U21.57 | length 22806.4
  Top Layer w8: v1(2250,2830) 2252.5,2832.5 U16.19@2252.5,2890.5
  Top Layer w15: U21.18@6070,2084.57 v1@6224,2084.57 ; U21.8@6070,2399.53 6205.47,2399.53 v1(6269,2336) ; U21.1@6070,2620 v1@6225,2620 ; U21.47@6566.06,2084.57 6609.13,2084.57 6623.69,2070 v1(6630,2070) ; U21.57@6566.06,2399.53 6620.47,2399.53 v1(6635,2385) ; U20.18@6880,2085 v1(6965,2085) ; U20.8@6880,2399.53 v1@6964.53,2399.53 ; U20.1@6880,2620 v1(6955,2620) ; U20.47@7376.06,2084.57 v1(7439.57,2084.57) ; U20.57@7376.06,2399.53 v1@7439.53,2399.53
  Top Layer w30: C1.1@1960,4557.09 1984.59,4557.09 C1.1@1987.5,4560 ; U13.1@2327.5,4200 2080,4447.5 2080,4560 ; U12.1@2327.5,4570 2090,4570 2080,4560 ; U11.1@2327.5,4900 C1.1@1987.5,4560 ; 6049,1153 6052,1153 v1(6163,1264) ; U21.32@6076.31,1637.31 6163,1550.62 v1(6163,1550) ; v1(6225,3001) 6347,3001 v1(6390,2958) ; v1(6733,2399) v1(6808,2399) ; 6880,1632 6880,1527 v1(6897,1510) ; v1(6955,2620) 6965,2610 v1(6965,2400) v1@6964.53,2399.53 ; U15.32@7130,4710 7204,4636 7755.11,4636 7781.11,4610 U14.32@7790,4610 ; v1(7139,1422) v1(7285,1422) 7592,1422 pad.0@7660,1490 pad.0@7760,1490 pad.0@7860,1490 pad.0@7960,1490 pad.0@8060,1490 ; v1(7418,2699) 7481,2699 7556,2624 v1(7556,2446) ; C1.1@1987.5,4560 2080,4560
  Top Layer w50: J2.2@5790,4800 5790,4647 5849,4588 6379,4588 6439,4648 6439,4750 6518,4829 7011,4829 U15.32@7130,4710
  Top Layer w70: v1(3148,4905) 3180,4937 5690,4937 5790,4837 J2.2@5790,4800
  Top Layer w100: C1.1@1960,4557.09 1960,4612
  Bottom Layer w8: 8055.48,4571.54 R32.1@8080,4571.54
  Bottom Layer w30: 2080,4560 2080,4005 2350,3735 2350,2930 v1(2250,2830) C58.1@2210,2790 ; C58.1@2197.56,2790 2299.24,2688.31 2473.36,2688.31 2513.46,2728.41 R38.1@2513.46,2730 ; J3.22@5020,1210 5020,1242 5357,1579 6134,1579 v1(6163,1550) ; v1(6163,1264) v1(6163,1550) ; v1@6224,2087.44 C90.1@6360,2087.44 6560,2087.44 C85.1@6565,2092.44 6607.56,2092.44 v1(6630,2070) 6635,2075 v1(6635,2385) ; v1(6225,2617.56) C93.1@6270,2617.56 C94.1@6360,2617.56 6448.44,2706 ; v1(6225,3001) v1(6225,4584) ; v1(6269,2336) 6269,2401.44 C91.1@6270,2402.44 C92.1@6360,2402.44 C82.1@6465,2402.44 6466.02,2403.47 C81.1@6566.06,2403.47 6616.53,2403.47 v1(6635,2385) ; v1(6390,2958) 6448.44,2899.56 6448.44,2706 ; v1@6635,2391.54 v1(6635,2385) ; v1(6733,2399) 6719,2385 v1(6635,2385) ; v1(6808,2399) 6964,2399 v1(6965,2400) ; U15.32@7130,4710 7015.44,4710 C55.1@6988,4682.56 6997.46,4682.56 7027.72,4652.3 7027.72,4545.82 7110.53,4463 7198.54,4463 R36.1@7220,4441.54 ; v1(7139,1422) 7111,1450 C75.1@7111,1500.44 ; C76.1@7192,1501.44 7112,1501.44 C75.1@7111,1500.44 ; v1(7285,1422) 7556,1693 v1(7556,2446) ; v1(7418,2699) 7181.44,2699 C84.1@7110,2627.56 C83.1@7020,2627.56 6962.56,2627.56 v1(6955,2620) 6869,2706 6448.44,2706 ; v1(7439.57,2084.57) 7436.69,2087.44 C73.1@7375,2087.44 C74.1@7295,2087.44 C78.1@7110,2087.44 C77.1@7020,2087.44 6967.44,2087.44 v1(6965,2085) v1(6965,2400) ; v1(7440,2400) 7436.53,2403.47 C71.1@7376.06,2403.47 7296.02,2403.47 C72.1@7295,2402.44 C80.1@7110,2402.44 C79.1@7020,2402.44 6967.44,2402.44 v1(6965,2400) ; U14.32@7790,4610 7837,4657 7909.47,4657 7923.91,4642.56 C56.1@7975,4642.56 ; C56.1@7984.46,4642.56 8055.48,4571.54 ; v1(6163,1550) 6219.56,1493.44 C87.1@6313,1493.44 C88.1@6409,1493.44 6880.44,1493.44 v1(6897,1510) 6906.56,1500.44 C75.1@7111,1500.44
  other v1: 6224,2086 1934,4606 1988,4606 1960,4643
VCC25: C2.1 C3.1 C4.1 C5.1 C24.1 C95.1 C96.1 C97.1 J1.8 JP2.3 JP3.3 JP4.3 pad.3@3487,3923 R7.1 R8.1 R28.1 U2.3 U2.58 U2.123 U2.178 U11.2 | length 15595.9
  Top Layer w10: U2.58@3685,2417.95 3743.91,2417.95 3816.96,2491 3893,2491 4017,2615 v1(4017,2658) ; U2.3@3685,3500.63 3875.37,3500.63 v1(3988,3388) ; v1(4696,2593) 4790,2593 4910,2473 4910,2450 4942.05,2417.95 U2.123@4992.09,2417.95 ; U2.178@4992.09,3500.63 5065.63,3500.63 v1(5089,3524)
  Top Layer w30: J1.8@1515,2200 1610,2295 2192,2295 v1(2367,2120) ; U11.2@2586,4810 v1(2770,4810) 2929.61,4810 C24.1@2930,4810.39 3104.61,4810.39 v1(3105,4810) ; v1(2628,2957) 2628,2761 v1(2724,2665) ; v1@3990,3390 4076,3304 4076,3168 v1(4032,3124) 4017,3109 v1(4017,2658) 4065.33,2658 4095.33,2628 v1(4162,2628) 4661,2628 v1(4696,2593)
  Bottom Layer w10: 4038.44,3388 4039,3387.44
  Bottom Layer w20: 5693,4907 5694.56,4907 ; 5740.56,4640.56 5740.56,4861
  Bottom Layer w30: J1.8@1515,2200 1653.46,2200 R8.1@1653.46,2199 ; R7.1@1658,2136.46 R8.1@1658,2203.54 ; v1(2367,2120) 2724,2477 v1(2724,2665) ; R28.1@2603.46,4900 2680,4900 v1(2770,4810) 2451,4810 2215,4574 2215,4135 2628,3722 v1(2628,2957) ; v1(3105,4810) 3148,4810 3377,4581 3377,4025 3534,3868 3534,3501 3560,3475 3564,3475 3592,3447 3929,3447 v1(3988,3388) 4038.44,3388 ; C2.1@3961.56,2688 3987,2688 v1(4017,2658) ; C95.1@3963.56,3029 3963.56,3055.56 v1(4032,3124) ; 4040,3386.44 4039,3387.44 C5.1@4715,3387.44 ; C96.1@4161,2543.56 4162,2544.56 v1(4162,2628) ; C97.1@4694,2643.44 4694,2595 v1(4696,2593) C4.1@4696,2542.56 ; v1(5089,3524) 5280,3715 JP3.3@5280,3870 JP4.3@5280,4025 JP2.3@5280,4180
  Bottom Layer w50: v1(3105,4810) 3132,4810 3257,4935 5665,4935 5693,4907 ; JP2.3@5280,4180 5740.56,4640.56 ; 5694.56,4907 5740.56,4861
VCC33: C26.1 C27.1 C28.1 C29.1 C30.1 C31.1 C32.1 C33.1 C34.1 C35.1 C36.1 C37.1 C38.1 C39.1 C40.1 C41.1 C42.1 C43.1 C44.1 C45.1 C46.1 C47.1 C48.1 C49.1 C50.1 C51.1 C52.1 C53.1 C54.1 C57.1 C66.1 C67.1 J1.4 J1.6 J2.3 J3.21 J6.4 pad.0@8160,1490 pad.0@8260,1490 pad.0@8360,1490 pad.0@8460,1490 pad.0@8560,1490 pad.4@3353,3929 R1.1 R2.1 R11.2 R13.1 R14.1 R15.1 R17.2 R21.2 R52.1 R53.1 R54.1 R55.1 R56.1 R57.1 R61.1 R66.1 R74.1 U1.7 U1.18 U1.31 U1.42 U2.7 U2.15 U2.35 U2.47 U2.66 U2.77 U2.96 U2.104 U2.124 U2.136 U2.154 U2.170 U2.192 U2.206 U2.213 U2.225 U3.7 U3.18 U3.31 U3.42 U4.3 U4.7 U4.8 U5.2 U6.7 U6.18 U6.31 U6.42 U7.7 U7.18 U7.31 U7.42 U8.7 U8.18 U8.31 U8.42 U9.7 U9.18 U9.31 U9.42 U10.7 U10.18 U10.31 U10.42 U13.2 U16.20 U18.1 X1.4 | length 42048.3
  Top Layer w10: U3.42@2788.66,2193.11 v1@2865,2193.11 ; U3.31@2788.66,2409.64 v1@2863.64,2409.64 ; v1@2994,2409.64 U3.18@3080,2409.64 ; v1@2994.55,2193.11 U3.7@3080,2193.11 ; v1(3550,3251) 3554.5,3255.5 3554.5,3364.5 v1(3601,3411) 3611.89,3421.89 U2.7@3685,3421.89 ; v1(3612,3246) 3612,3247 3629.41,3264.41 U2.15@3685,3264.41 ; U2.47@3685,2634.49 3736.49,2634.49 3754,2652 3794,2652 3831,2689 3908,2689 v1(3973,2754) 3856.29,2870.71 U2.35@3685,2870.71 ; U10.7@3750.11,3881 v1@3750.11,3957 ; v1@3750.11,4099.89 U10.42@3750.11,4172.34 ; U7.31@3804.36,1722.66 v1(3804.36,1794) ; v1@3804.36,1934.64 U7.18@3804.36,2014 ; U2.66@3856.26,2305.75 3856.26,2369.3 3995.96,2509 3996.5,2509 v1(3996.5,2528.5) 4026.5,2528.5 4072.8,2482.2 U2.77@4072.8,2305.75 ; U10.18@3966.64,3881 v1@3966.64,3955.36 ; v1@3966.64,4099.35 U10.31@3966.64,4172.34 ; U7.42@4020.89,1722.66 v1@4020.89,1794 ; v1@4020.89,1933 U7.7@4020.89,2014 ; U2.225@4053.11,3612.83 4053.11,3446.89 4153,3347 v1(4153,3162) ; v1@4156,3168 4289.33,3301.33 U2.213@4289.33,3612.83 ; v1(4357,2528) 4378,2507 4378,2486 4446.81,2417.19 U2.96@4446.81,2305.75 ; U2.206@4427.13,3612.83 4427.13,3543.13 4404,3520 4404,3387.54 v1(4567.54,3224) ; v1(4564,2785) 4610,2785 4705,2690 4908.21,2690 4924.35,2673.86 U2.136@4992.09,2673.86 ; v1@4568,3226 4568,3331.35 4702.72,3466.07 ; v1(4569,3082) 4622.81,3028.19 U2.154@4992.09,3028.19 ; v1@4602.35,1656.36 U1.31@4602.35,1722.66 ; v1@4602.35,1937.36 U1.18@4602.35,2014 ; U2.104@4604.29,2305.75 4604.29,2544.71 ; U8.7@4633.11,3881 v1@4633.11,3959.89 ; v1@4633.11,4099.11 U8.42@4633.11,4172.34 ; U2.192@4702.72,3612.83 4702.72,3466.07 ; v1(4792,2130) 4815,2107 4815,2063.89 4818.89,2060 U1.7@4818.89,2014 ; v1@4818.89,1656 U1.42@4818.89,1722.66 ; U8.18@4849.65,3881 v1@4849.65,3959.64 ; v1@4849.65,4099.35 U8.31@4849.65,4172.34 ; U2.124@4992.09,2437.64 5057.36,2437.64 5087,2408 5087,2363 v1(5004,2280) ; U2.170@4992.09,3343.15 4796.85,3343.15 4702.72,3437.28 4702.72,3466.07 ; U6.18@5383,2522.36 v1@5460.65,2522.36 ; U6.7@5383,2738.89 v1@5462.11,2738.89 ; U9.18@5383,3211.36 v1@5461.65,3211.36 ; U9.7@5383,3427.89 v1@5461.11,3427.89 ; v1@5598.35,2522.36 U6.31@5674.34,2522.36 ; v1@5598.89,2738.89 U6.42@5674.34,2738.89 ; v1@5599.11,3427.89 U9.42@5674.34,3427.89 ; v1@5599.35,3211.36 U9.31@5674.34,3211.36 ; v1@6572.04,1149.96 J6.4@6572.04,1260
  Top Layer w30: v1(2040,2795.13) 2045.43,2800.56 C57.1@2100,2800.56 ; 2100,2817.56 2100,2850 2140.5,2890.5 2219,2890.5 ; U13.2@2586,4110 2586,2621 v1(2585,2620) 2935,2620 2970,2655 2970,2853 ; C54.1@2909.61,3950 2909.61,3844.39 v1(2933,3821) ; X1.4@2970,2988.9 2970,2853 ; R17.2@3100.46,3282 3100.46,3178.54 3198,3081 ; U4.3@3250,3200 3250,3133 3198,3081 ; v1(3251.5,4036.5) 3317,4102 v1(3424,4102) ; U4.7@3300,2980 3300,2939 3271,2910 3027,2910 ; U4.7@3308,2980 U4.8@3342,2980 ; v1(4069,2602) 4168,2503 v1(4168,2394) ; v1(4569,2580) 4604.29,2544.71 4625,2524 4653.33,2524 4722,2455.33 v1(4722,2395.44) ; v1(5118,2165) 5119,2165 v1(5233,2279) ; 7670,1337.56 C67.1@7735,1337.56 C66.1@7815,1337.56 7886.56,1337.56 v1(7887,1338) 8008,1338 pad.0@8160,1490 pad.0@8260,1490 pad.0@8360,1490 pad.0@8460,1490 pad.0@8560,1490 ; 2970,2853 3027,2910 ; 3027,2910 3198,3081
  Top Layer w100: U13.2@2586,4110 v1(2760,4110) 2889.61,4110 2909.61,4090 C54.1@2909.61,3975
  Bottom Layer w10: v1(3550,3251) 3553,3248 3610,3248 v1(3612,3246) ; C36.1@3965,3860.44 C36.1@3970.44,3855 ; C44.1@5692.56,3211 C44.1@5695,3208.56
  Bottom Layer w30: R56.1@1480,1328.46 1467.46,1328.46 1397,1258 1397,1177.24 1325,1105.24 ; J1.4@1515,2400 J1.6@1515,2300 1575,2360 1905,2360 2165,2620 ; v1(2040,2795.13) 2040,2745 2165,2620 ; R52.1@2135,1328.46 2133.41,1328.46 1910.19,1105.24 ; R53.1@2325,1328.46 2323.41,1328.46 2238.7,1243.75 2238.7,1185.37 2158.57,1105.24 1910.19,1105.24 ; v1(2585,2620) 2165,2620 ; R74.1@2598.46,4200 2675,4200 2760,4115 v1(2760,4110) 2794,4144 3144,4144 3489,3799 3489,3468 3547,3410 3884,3410 3966,3328 4051.05,3328 4152.46,3226.59 R15.1@4152.46,3225 R61.1@4152.46,2902 4152.46,2806 ; v1(2867,2413) 2866.44,2412.44 C30.1@2766,2412.44 C33.1@2766,2192.56 v1(2994,2192.56) C32.1@3103,2192.56 C31.1@3103,2412.44 v1@2994.44,2412.44 ; v1(2933,2623) 2933.31,2622.69 2933.31,2521.64 2973.41,2481.54 R11.2@2975,2481.54 2975,2431 v1(2994,2412) ; v1(2933,3821) 3049,3705 U5.2@3080,3705 ; v1(3424,4102) 3425,4101 3636.67,4101 3687.88,4049.79 3718.54,4049.79 3750,4081.25 ; R21.2@3693.46,1910 3789,1910 3804.56,1925.56 C28.1@3804.56,2037 C29.1@4021.44,2037 ; C34.1@3752.56,4190 3751,4188.44 v1(3751,4099) ; v1@3803.56,1794 C26.1@3803.56,1699 C27.1@4020.44,1699 4021.44,1700 v1(4021.44,1794) C29.1@4021.44,2037 ; C36.1@3965,3860.44 v1(3965,3957) v1(3751,3957) ; C35.1@3966.44,4189 3967,4188.44 v1(3967,4099) v1(3751,4099) ; v1(3973,2754) 4100.46,2754 4152.46,2806 ; v1(3996.5,2528.5) 4144.46,2676.46 R1.1@4282,2676.46 ; v1(4357,2528) 4357,2641 4323.54,2674.46 ; R66.1@4567.54,3291 R13.1@4567.54,2998 R14.1@4567.54,2849 4567.54,2791 R2.1@4451,2674.46 ; v1(4569,2580) 4474.54,2674.46 R2.1@4451,2674.46 ; C50.1@4602.56,2038 C53.1@4602.56,1699 4602.56,1656.56 v1(4602,1656) v1(4818,1656) 4819.44,1657.44 C52.1@4819.44,1699 C51.1@4819.44,2038 4819.44,2101.56 4662,2259 4303,2259 v1(4168,2394) 4166,2394 4021.44,2249.44 C29.1@4021.44,2037 ; C38.1@4632.56,4190 4633,4189.56 v1(4633,4099) ; v1(4722,2395.44) 4812.44,2305 4978,2305 v1(5118,2165) ; C40.1@4853.44,3855 4850,3858.44 v1(4850,3960) v1(4633,3960) ; C49.1@5358,2521.56 v1@5598,2521.56 ; C46.1@5360,2742.44 5364.44,2738 v1(5463,2738) v1(5598,2738) ; C45.1@5360,3208.56 5459.56,3208.56 v1(5462,3211) ; C42.1@5360,3431.44 5364.44,3427 v1(5462,3427) v1(5462,3211) ; v1(5462,2521) v1@5598,2521.56 ; J2.3@5690,4800 5119.72,4229.72 4883.7,4229.72 4853.44,4199.46 C39.1@4853.44,4190 4850,4186.56 v1(4850,4099) v1(4633,4099) ; C44.1@5692.56,3211 v1(5599,3211) ; C44.1@5695,3208.56 5737.44,3208.56 5768,3178 5768,2774 5736.44,2742.44 C47.1@5695,2742.44 5602.44,2742.44 v1(5598,2738) ; C43.1@5695,3432.44 5690.56,3428 v1(5599,3428) v1(5599,3211) ; v1(6573,1149) 6510.61,1086.61 ; v1(7887,1338) 7757.5,1208.5 7513.71,1208.5 7391.82,1086.61 6510.61,1086.61 ; 1325,1105.24 1910.19,1105.24 ; 1325,1105.24 1257.73,1105.24 1221.78,1141.19 1221.78,1266.83 1283.41,1328.46 R55.1@1285,1328.46 1380,1423.46 R57.1@1380,1696.54 1378.41,1696.54 1320.2,1754.75 1320.2,1881.01 1356.15,1916.96 1430.27,1916.96 1665.69,1681.54 2228.41,1681.54 2165,1744.95 2165,2620 ; v1(3751,3957) 3751,3821 3943,3629 4460,3629 4632.56,3801.56 C41.1@4632.56,3856 4633,3856.44 v1(4633,3960) ; v1(3751,3957) v1(3751,4099) ; 4152.46,2806 R1.1@4282,2676.46 ; R1.1@4282,2676.46 4283.59,2676.46 4285.59,2674.46 4323.54,2674.46 ; 4323.54,2674.46 R2.1@4451,2674.46 ; v1(4633,3960) v1(4633,4099) ; v1(5462,3211) v1(5599,3211) ; v1@5598,2521.56 v1(5598,2522) v1(5598,2738) ; v1@5598,2521.56 C48.1@5695,2521.56 5738.44,2521.56 5767,2493 5767,2376 5681,2290 5509,2290 5454,2345 5299,2345 v1(5233,2279) 5233,1523 J3.21@4920,1210 5043.39,1086.61 6510.61,1086.61
  other v1: 4021,1933 3805,1934 4602,1937 2865,2193
VCC+12: C62.1 C63.1 C98.1 D1.K J4.4 P2.3 pad.0@1824,4750 U17.8 | length 3844.6
  Top Layer w30: P2.3@1317,3529 1400,3612 1736,3612 1770,3646 ; J4.4@1610,4750 1420,4560 1420,4228.89 1460.89,4188 1559.11,4188 1572,4200.89 1572,4300.32 1548,4324.32 1548,4383 1577,4412 1872,4412 1976,4308 1976,4138.52 C63.1@1877.48,4040 ; D1.K@1770,3445.2 1770,3646 ; v1(2224,3568) 2224,3498 U17.8@2225,3497 ; v1(2224,3740) 1920,4040 C63.1@1877.48,4040 ; 1770,3646 1770,3985 1825,4040 C63.1@1877.48,4040
  Bottom Layer w30: v1@2224,3566 v1(2224,3568) C62.1@2224,3608.44 ; C62.1@2224,3622.44 v1(2224,3740)
  Bottom Layer w70: J4.4@1610,4750 pad.0@1824,4750
VCC-12: C64.2 C65.2 C99.2 D2.A J4.2 P2.4 pad.-12 R43.1 U17.4 | length 4477.8
  Top Layer w30: J4.2@1610,4350 1847,4350 1891,4306 1891,4189 1720,4018 v1(1720,3905) ; v1(1850,2725) 1917.2,2792.2 D2.A@1917.2,2844 ; v1(1850,3431) 1850,3665 1877.48,3692.48 C65.2@1877.48,3770 1875,3772.48 v1(1875,3905) ; C65.2@1900,3770 2000,3670 2283.11,3670 2450,3503.11 2450,3500 2452.44,3497.56 C64.2@2452.44,3400 2452.44,3332.44 2430,3310 U17.4@2380,3310
  Bottom Layer w30: P2.4@1217,3529 1294,3606 1589,3606 1720,3737 v1(1720,3905) v1(1875,3905) ; J4.2@1610,4350 1610,4412 pad.-12@1949,4751 ; v1(1850,2725) v1(1850,3431)
VCCINT: C6.1 C7.1 C8.1 C9.1 C10.1 C11.1 C12.1 C13.1 C14.1 C15.1 C16.1 C17.1 C18.1 C19.1 C20.1 C21.1 C22.1 C23.1 C25.1 pad.5 R72.1 U2.1 U2.10 U2.19 U2.40 U2.53 U2.60 U2.61 U2.74 U2.85 U2.101 U2.115 U2.121 U2.129 U2.140 U2.163 U2.174 U2.180 U2.190 U2.198 U2.204 U2.220 U2.228 U12.2 | length 9273.5
  Top Layer w10: U2.60@3685,2378.58 3758,2378.58 3758,2335 3757.83,2334.83 U2.61@3757.83,2305.75 ; U2.53@3685,2516.38 3793.38,2516.38 3802,2525 3822,2525 v1(3852,2555) ; U2.40@3685,2772.28 v1(3852.28,2772.28) ; U2.19@3685,3185.67 v1(3852.67,3185.67) ; U2.10@3685,3362.83 3852.83,3362.83 v1(3858,3368) ; U2.1@3685,3540 3952,3540 v1(3994.06,3497.94) U2.228@3994.06,3612.83 ; 3759.61,2381.61 3823,2445 v1(3862,2445) ; v1(4002,2432) 4013.74,2420.26 U2.74@4013.74,2305.75 ; v1(4151.54,3496.54) U2.220@4151.54,3612.83 ; U2.85@4230.28,2305.75 v1(4230.28,2430.72) ; U2.204@4466.5,3612.83 4466.5,3507.5 v1(4476,3498) ; v1(4518,2431) 4545.24,2403.76 U2.101@4545.24,2305.75 ; v1(4584.61,3497.61) U2.198@4584.61,3612.83 ; U2.190@4742.09,3612.83 4742.09,3511.91 v1(4756,3498) ; v1(4816,2433) 4820.83,2428.17 U2.115@4820.83,2305.75 ; v1(4847,3487) 4900,3540 U2.180@4992.09,3540 ; v1(4868,2452) 4868,2436 4925.42,2378.58 U2.121@4992.09,2378.58 ; v1(4868,2632) 4868,2606 4937.94,2536.06 U2.129@4992.09,2536.06 ; v1(4868,2744) 4876.6,2752.6 U2.140@4992.09,2752.6 ; v1(4868,3200) 4873.35,3205.35 U2.163@4992.09,3205.35 ; v1(4868.11,3421.89) U2.174@4992.09,3421.89
  Top Layer w30: U12.2@2586,4480 v1(2750,4480) 2790,4480 2919.61,4350.39 C25.1@2919.61,4230 3030,4119.61 v1(3030,4095)
  Bottom Layer w30: R72.1@2608.46,4570 2660,4570 v1(2750,4480) ; v1(3030,4095) 3088,4095 3435,3748 3435,3420 3492.17,3362.83 3852.44,3362.83 C19.1@3852.44,3313 C8.1@3852.44,3140 v1@3852.44,2780 ; 3852.44,2453.56 v1@3852.44,2772.28 ; v1@3852.83,3362.83 v1(3858,3368) ; v1(3862,2445) 3874.56,2432.44 C7.1@3922,2432.44 C11.1@4057,2432.44 v1@4230,2432.44 ; v1@3994.06,3497.56 C21.1@4410,3497.56 C23.1@4532,3497.56 C16.1@4805,3497.56 4836.56,3497.56 ; v1@4230.28,2432.44 C10.1@4293,2432.44 4545.24,2432.44 ; 4550,2432.44 4856.44,2432.44 4867.56,2443.56 4867.56,2536 ; v1@4855,3482 4867.56,3469.44 C17.1@4867.56,3370 C15.1@4867.56,3159 v1@4867.56,2752.6 ; 4867.56,2540 C9.1@4867.56,2581 C14.1@4867.56,2700 v1@4867.56,2750
VSYNC: J6.33 U7.46 | length 3481.3
  Top Layer w8: U7.46@4099.63,1722.66 4099.63,1654.16 4353.79,1400 4972.36,1400 5336.36,1036 6954.64,1036 7142.21,1223.57 J6.33@7142.21,1260
WDI: U2.22 U5.6 | length 1045.1
  Top Layer w8: U5.6@2980,3405 3029.09,3405 3084.09,3350 v1(3425,3350) ; U2.22@3685,3126.61 3786.61,3126.61 v1(3790,3130)
  Bottom Layer w8: v1(3425,3350) 3425,3341.77 3636.77,3130 v1(3790,3130) v1@3780,3130
WELU: U1.32 U20.24 U20.25 U21.24 U21.25 | length 3013.8
  Top Layer w8: U1.32@4622.04,1726.66 4622.04,1764.25 4790.79,1933 5108,1933 v1(5400,2225) ; U21.24@6070,1895.59 U21.25@6070,1864.09 6149.09,1864.09 v1(6185,1900) ; U20.24@6880,1895.59 U20.25@6880,1864.09 6939.09,1864.09 v1(6975,1900)
  Bottom Layer w8: v1@5405,2225 5510,2225 5835,1900 v1(6185,1900) v1(6975,1900)
WR: U9.37 U15.29 | length 2363.3
  Top Layer w8: U9.37@5674.34,3329.47 6101.47,3329.47 v1(6297,3525) ; v1(6388,4093) 6529,3952 v1(6615,3952)
  Bottom Layer w8: v1(6297,3525) 6297,4002 v1(6388,4093) ; v1(6615,3952) 6615,4061 6929,4375 7095,4375 U15.29@7130,4410
X+: J6.37 U18.2 | length 532.7
  Top Layer w8: J6.37@7220.95,1260 7220.95,1290.95 7225.63,1295.63 7225.63,1296.84 7323.79,1395 7610,1395 7633.98,1371.02 U18.2@7633.98,1336
X-: J6.39 U18.4 | length 490.9
  Top Layer w8: J6.39@7260.32,1260 7260.32,1285.4 7269.54,1294.62 7284.62,1294.62 v1(7300,1310) ; U18.4@7582.8,1336 7582.8,1287.2 v1@7597.5,1272.5
  Bottom Layer w8: v1(7300,1310) 7300,1320 7310,1330 7540,1330 v1(7605,1265)
Y+: J6.40 U18.3 | length 637.9
  Top Layer w8: J6.40@7280,1260 7305,1260 v1(7330,1285) ; U18.3@7608.39,1336 7608.39,1301.61 v1(7645,1265)
  Bottom Layer w8: v1(7330,1285) 7291.77,1285 7276.5,1300.27 7276.5,1319.73 7301.77,1345 7565,1345 v1(7645,1265)
Y-: J6.38 U18.5 | length 424
  Top Layer w8: J6.38@7240.63,1260 7240.63,1290.63 7330,1380 7550,1380 7557.2,1372.8 U18.5@7557.2,1336
pads on no net: J1.7 J4. J5. J6.35 S1.0 S1.2 SW1.6 SW1.7 SW2.6 SW2.7 U5.4 U5.5 U10.12 U10.17 U10.23 U10.26 U10.32 U10.37 U15.1 U18.9 U20.4 U20.5 U20.6 U20.7 U20.9 U20.10 U20.11 U20.12 U20.14 U20.15 U20.16 U20.17 U20.19 U20.20 U20.21 U20.22 U20.38 U20.40 U21.38 U21.40

## Polygon pours and split planes (outlines as drawn)
AGND on Bottom Layer "Boost Bottom" (solid, remove dead copper, pour order 12): 5341.28,1550 5907.52,1550 6014.09,1461.17 6015.37,1460.1 6077,1460.1 6077,1109.07 6075.72,1108 5508.2,1108 5508.2,1110.14 5340,1250.34 5342.57,1252.48 5342.57,1548.93
VCC5 on Bottom Layer "Power Bottom" (solid, remove dead copper, pour order 8): 1009,4955 3181,4955 3185,4951 3185,3774 2503,3774 2501,3772 2121,4152 2118,4152 1016,4152 1009,4159
AGND on Bottom Layer "Analog Bottom" (solid, remove dead copper, pour order 2): 1003,4116 2113,4116 2116,4116 2550,3682 2551,3681 2551,2786 2024,2786 1926,2688 1002,2688
AGND on Top Layer "Top Layer-No Net" (solid, remove dead copper, pour order 10): 2662,3179 2663,3178 3076,3178 3076,2984 3079,2981 2662,2981
AGND on Top Layer "Power Top" (solid, remove dead copper, pour order 6): 1008,4959 1011,4956 3186,4956 3186,3783 3189,3780 3183,3774 2533,3774 2501,3774 2116,4159 1009,4159
AGND on Top Layer "Analog Top" (solid, remove dead copper, pour order 4): 1004,4116 2115,4116 2116,4116 2551,3681 2551,2786 2025,2786 1927,2688 1001,2688

## Keep-outs
Keep-Out Layer:
  lines w10: 1785,1965 2085,1965
Mechanical 1:
  lines w10: 990,2680 2560,2680 2560,3570 2560,3685 2120,4125 1000,4125 ; 1245,3645 1545,3645 1545,3945 1245,3945 1245,3645 ; 6065,4621 6365,4621 6365,4918 6065,4918 6065,4621

## Other copper
Top Layer:
  region net AGND: 5653,1479 5578,1479 5578,1414 5598,1414 5603,1409 5603,1309 5483,1309 5483,1174 5548,1174 5548,1279 5553,1284 5713,1284 5738,1259 5788,1259 5788,1309 5633,1309 5633,1414 5653,1414
  region net NetC69_2: 5343,1489 5343,1549 5918,1549 5917,1439 5718,1439 5668,1489
  region net NetD3_A: 5643,1404 6041,1404 6077,1368 6077,1304 5818,1304 5818,1319 5643,1319
  region net NetC69_1: 5593,1379 5550,1379 5550,1474 5475,1474 5475,1381 5404,1381 5403,1183 5468,1184 5468,1319 5593,1319
  region net NetR58_2: 5568,1144 5603,1144 5603,1274 5568,1274
  region net VCC5: 5703,1274 5733,1244 6077,1244 6077,1108 5633,1108 5633,1274
  pour cut-out: 1245,3945 1545,3945 1545,3645 1245,3645
Bottom Layer:
  pour cut-out: 1243,3943 1543,3943 1543,3643 1243,3643